# EAGLE board Mega_Shield-v13 (EAGLE 8.4.1)
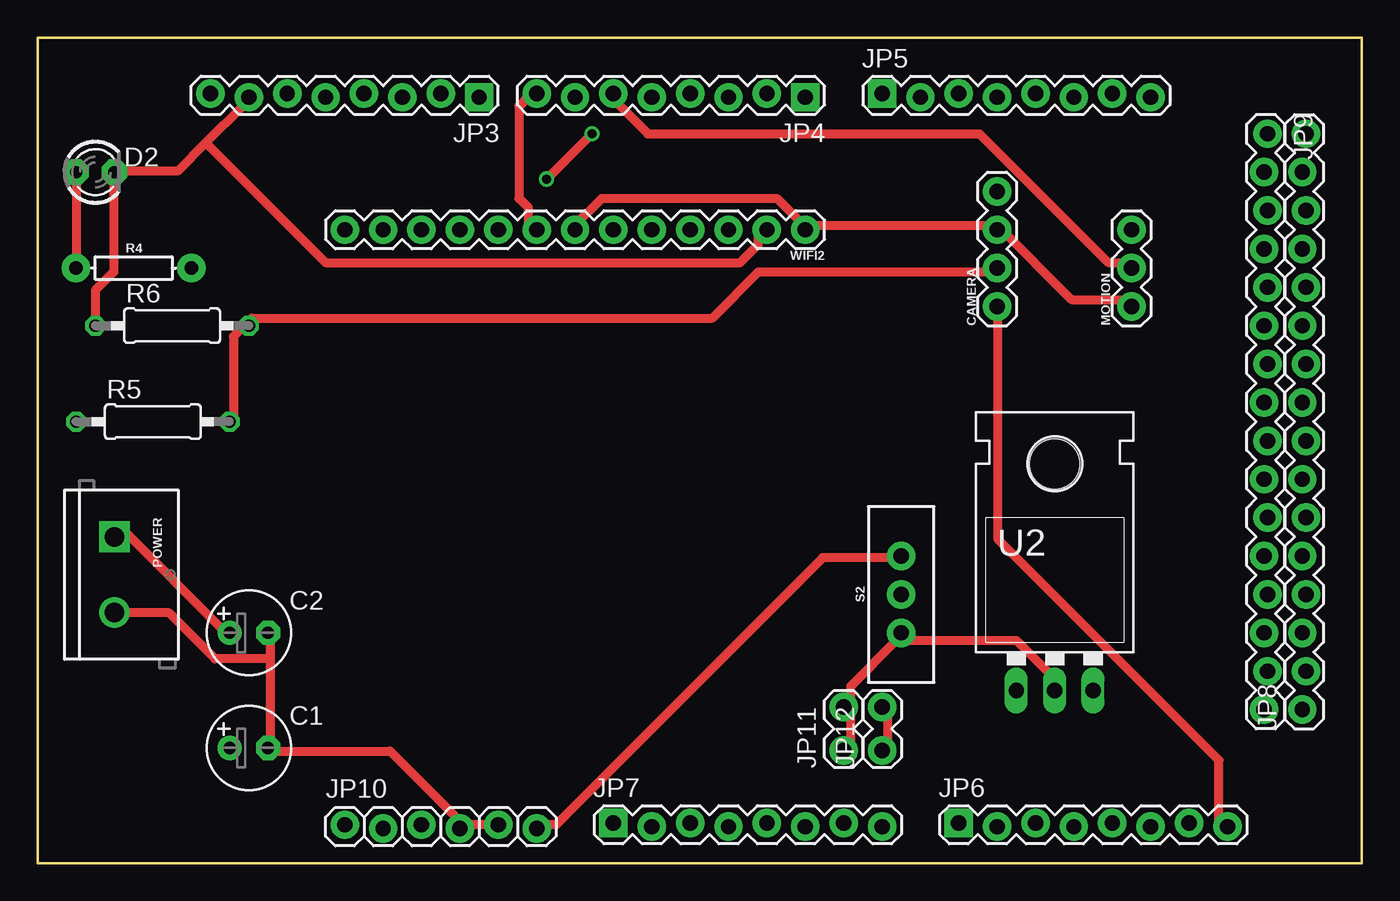
[diagram p0: board, top side]
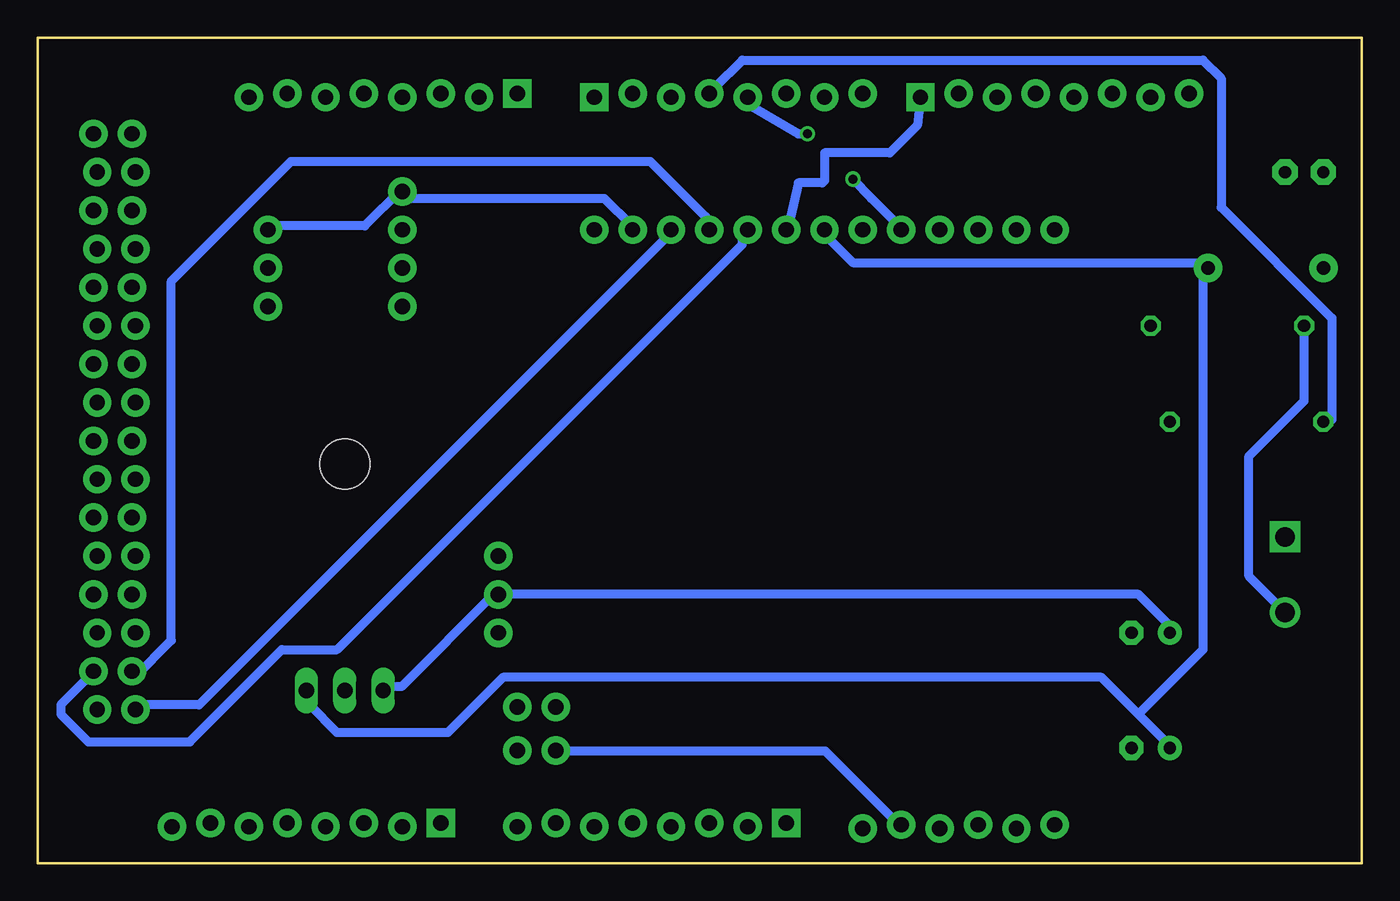
[diagram p1: board, bottom side, seen from below]

Size 87.63 x 54.61 mm. Coordinates in mm from the lower left corner, seen from the top.
Outline: 87.63,54.61 0,54.61 0,0 87.63,0 87.63,54.61
Copper layers (1*16): Top 0.035mm / dielectric 1.5mm / Bottom 0.035mm
Design rules "default *": minimum track width 24mil, minimum drill 0.35mm, track to track 24mil, track to pad 24mil, pad to pad 24mil, via to via 24mil, smd to smd 24mil, copper to edge 40mil, drill to drill 24mil, minimum pad ring 10mil, minimum via ring 8mil, stop-mask expansion 4mil, vias tented up to drill 0mil, thermal gap 10mil

## Footprints (pad centres in the part's own frame; a part is rotated, then mirrored left to right if it is on the bottom)
E2,5-6 = drill 0.813 pad 1.6: + -1.27,0 | drill 0.813 pad 1.6 octagon: - 1.27,0
1X04 = drill 1.016 pad 1.88: 1 0,0; 2 2.54,0; 3 5.08,0; 4 7.62,0
LED3MM = drill 0.813 pad 1.676 octagon: A -1.27,0; K 1.27,0
1X08_LOCK = drill 1.016 pad 1.88 square: 1 0,0.127 | drill 1.016 pad 1.88: 2 2.54,-0.127; 3 5.08,0.127; 4 7.62,-0.127; 5 10.16,0.127; 6 12.7,-0.127; 7 15.24,0.127; 8 17.78,-0.127
1X16_LOCK = drill 1.016 pad 1.88: 1 0,0.127; 2 2.54,-0.127; 3 5.08,0.127; 4 7.62,-0.127; 5 10.16,0.127; 6 12.7,-0.127; 7 15.24,0.127; 8 17.78,-0.127; 9 20.32,0.127; 10 22.86,-0.127; 11 25.4,0.127; 12 27.94,-0.127; 13 30.48,0.127; 14 33.02,-0.127; 15 35.56,0.127; 16 38.1,-0.127
1X06_LOCK = drill 1.016 pad 1.88: 1 0,0; 2 2.54,-0.254; 3 5.08,0; 4 7.62,-0.254; 5 10.16,0; 6 12.7,-0.254
1X02_LOCK = drill 1.016 pad 1.88: 1 -0.178,0; 2 2.718,0
1X03 = drill 1.016 pad 1.88: 1 0,0; 2 2.54,0; 3 5.08,0
SCREWTERMINAL-5MM-2 = drill 1.3 pad 2.032 square: 1 0,0 | drill 1.3 pad 2.032: 2 5,0
AXIAL-0.3 = drill 0.9 pad 1.88: P$1 -3.81,0; P$2 3.81,0
0207/10 = drill 0.813 octagon: 1 -5.08,0; 2 5.08,0
SWITCH_SPDT_PTH_11.6X4.0MM = drill 1.016 pad 1.88: 1 0,2.54; 2 0,0; 3 0,-2.54
TO-220-ALT = drill 1.016 long: GND 0,-3.81; IN -2.54,-3.81; OUT 2.54,-3.81 | hole 3.302: 0,11.176
1X13 = drill 1.016 pad 1.88: 1 0,0; 2 2.54,0; 3 5.08,0; 4 7.62,0; 5 10.16,0; 6 12.7,0; 7 15.24,0; 8 17.78,0; 9 20.32,0; 10 22.86,0; 11 25.4,0; 12 27.94,0; 13 30.48,0

## Placement (x,y rotation side)
C1  10uf  [E2,5-6]  13.97,7.62 0 top
C2  10uf  [E2,5-6]  13.97,15.24 0 top
CAMERA  [1X04]  63.5,36.83 90 top
D2  [LED3MM]  3.81,45.72 0 top
JP3  [1X08_LOCK]  29.21,50.8 180 top
JP4  [1X08_LOCK]  50.8,50.8 180 top
JP5  [1X08_LOCK]  55.88,50.8 0 top
JP6  [1X08_LOCK]  60.96,2.54 0 top
JP7  [1X08_LOCK]  38.1,2.54 0 top
JP8  M16LOCK  [1X16_LOCK]  83.82,10.16 90 top
JP9  M16LOCK  [1X16_LOCK]  81.28,48.26 270 top
JP10  [1X06_LOCK]  20.32,2.54 0 top
JP11  [1X02_LOCK]  53.34,7.62 90 top
JP12  [1X02_LOCK]  55.88,7.62 90 top
MOTION  [1X03]  72.39,36.83 90 top
POWER  [SCREWTERMINAL-5MM-2]  5.08,21.59 270 top
R4  1k  [AXIAL-0.3]  6.35,39.37 0 top
R5  10k  [0207/10]  7.62,29.21 0 top
R6  10k  [0207/10]  8.89,35.56 0 top
S2  [SWITCH_SPDT_PTH_11.6X4.0MM]  57.15,17.78 0 top
U2  [TO-220-ALT]  67.31,15.24 0 top
WIFI2  [1X13]  50.8,41.91 180 top

## Library data of the parts
C1 C2 R5 R6 = rcl
CAMERA = SparkFun-Connectors; PROD_ID: CONN-09696
D2 = minimidi
JP3-JP12 = SparkFun
MOTION WIFI2 = SparkFun-Connectors
POWER = SparkFun-Connectors; SF_SKU: PRT-08432
R4 = SparkFun-Resistors; PROD_ID: RES-08380
S2 = SparkFun-Switches; PROD_ID: SWCH-08261; SF_SKU: COM-00102
U2 = SparkFun-IC-Power; PROD_ID: VREG-08450; SF_ID: COM-00107

## Nets
3.3: JP10.2
5V: JP10.3
5V@1: JP12.1 JP12.2
9V: JP10.6 S2.1
A0: JP7.1
A1: JP7.2
A2: JP7.3
A3: JP7.4
A4: JP7.5
A5: JP7.6
A6: JP7.7
A7: JP7.8
A8: JP6.1
A9: JP6.2
A10: JP6.3
A11: JP6.4
A12: JP6.5
A13: JP6.6
A14: JP6.7
A15: CAMERA.1 JP6.8
AREF: JP3.8
D2: JP4.3
D3: JP4.4 R5.1
D4: JP4.5 WIFI2.9
D5: JP4.6 MOTION.2
D6: JP4.7
D7: JP4.8 WIFI2.8
D8: JP3.1 WIFI2.6
D9: JP3.2
D10: JP3.3
D11: JP3.4
D12: JP3.5
D13: JP3.6
D14: JP5.8
D15: JP5.7
D16: JP5.6
D17: JP5.5
D18: JP5.4
D19: JP5.3
D22: JP9.1
D23: JP8.16
D24: JP9.2
D25: JP8.15
D26: JP9.3
D27: JP8.14
D28: JP9.4
D29: JP8.13
D30: JP9.5
D31: JP8.12
D32: JP9.6
D33: JP8.11
D34: JP9.7
D35: JP8.10
D36: JP9.8
D37: JP8.9
D38: JP9.9
D39: JP8.8
D40: JP9.10
D41: JP8.7
D42: JP9.11
D43: JP8.6
D44: JP9.12
D45: JP8.5
D46: JP9.13
D47: JP8.4
D48: JP9.14
D49: JP8.3
D50: JP9.15 WIFI2.4
D51: JP8.2 WIFI2.5
D52: JP9.16 WIFI2.3
D53: JP8.1
GND: C1.- C2.- CAMERA.4 D2.K JP3.7 JP10.4 JP10.5 JP11.1 JP11.2 MOTION.3 POWER.2 R6.1 S2.3 U2.GND WIFI2.2
N$1: C2.+ POWER.1 S2.2 U2.IN
N$3: D2.A R4.P$1
N$4: CAMERA.2 R5.2 R6.2
RES: JP10.1
RX0: JP4.1
SCL: JP5.1
SDA: JP5.2
TX1: JP4.2
VIN: C1.+ CAMERA.3 MOTION.1 R4.P$2 U2.OUT WIFI2.1 WIFI2.7

## Tracks (layer width: path | path; a pad name or v marks a point on that pad's centre or on a via)
5V@1
  Top 0.61: JP12.1 56.24,8.03 56.24,9.86 JP12.2
9V
  Top 0.61: JP10.6 33.07,2.54 34.29,2.54 51.97,20.22 56.85,20.22 S2.1
A15
  Top 0.61: CAMERA.1 63.55,36.68 63.55,21.44 78.18,6.81 78.18,2.54 JP6.8
D3
  Top 0.152: 43.18,50.8 JP4.4
  Bottom 0.61: R5.1 1.98,29.36 1.98,36.07 9.3,43.38 9.3,51.92 10.52,53.14 41,53.14 42.82,51.31 JP4.4
D4  (via drill 0.6 pad 0.85)
  Top 0.61: v36.68,48.26 v33.68,45.26
  Bottom 0.61: v33.68,45.26 32.46,43.99 30.63,42.16 WIFI2.9 | v36.68,48.26 37.29,48.26 40.39,50.09 JP4.5
D5
  Top 0.61: MOTION.2 72.09,39.73 70.87,39.73 62.33,48.26 40.39,48.26 37.95,50.7 JP4.6
D7
  Top 0.61: WIFI2.8 32.46,42.16 32.46,43.38 31.85,43.99 31.85,50.09 32.46,50.7 JP4.8
D8
  Bottom 0.61: JP3.1 29.41,48.82 31.24,46.99 35.56,46.99 35.56,45.16 35.71,45.01 37.29,45.01 37.95,42.16 WIFI2.6
D50
  Bottom 0.61: WIFI2.4 43.43,42.16 43.43,42.77 47.09,46.43 70.87,46.43 78.79,38.51 78.79,14.73 81.23,12.29 JP9.15
D51
  Top 0.152: 83.82,12.7 JP8.2
  Bottom 0.61: WIFI2.5 41,41.55 41,40.95 67.82,14.12 71.48,14.12 77.57,8.03 84.28,8.03 86.11,9.86 86.11,10.46 84.28,12.29 JP8.2
D52
  Bottom 0.61: JP9.16 80.62,10.46 76.96,10.46 45.87,41.55 WIFI2.3
GND
  Top 0.61: R6.1 3.81,37.9 5.03,39.12 5.03,45.21 D2.K 5.64,45.82 9.3,45.82 11.12,47.65 | 11.12,47.65 13.56,50.09 JP3.7 | JP11.1 53.8,8.03 53.8,9.86 JP11.2 53.8,10.46 53.8,11.68 56.85,14.73 S2.3 57.46,14.73 64.77,14.73 67.21,12.29 67.21,11.68 U2.GND | JP10.5 28.19,2.54 JP10.4 27.58,2.54 27.58,3.15 23.32,7.42 15.39,7.42 C1.- 15.39,8.03 15.39,13.51 | 15.39,13.51 15.39,14.73 C2.- | 15.39,13.51 11.73,13.51 8.69,16.56 5.64,16.56 POWER.2 | 11.12,47.65 19.05,39.73 46.48,39.73 47.7,40.95 47.7,41.55 WIFI2.2
  Bottom 0.508: 30.23,2.29 JP10.5
  Bottom 0.61: WIFI2.2 48.31,42.16 50.14,43.99 62.94,43.99 CAMERA.4 63.55,44.6 65.99,42.16 72.09,42.16 MOTION.3 | JP11.1 53.19,7.42 35.51,7.42 30.63,2.54 JP10.5 | R6.1 3.81,30.58 7.47,26.92 7.47,19 5.64,17.17 POWER.2
N$1
  Top 0.61: C2.+ 12.34,15.34 5.64,22.05 POWER.1
  Bottom 0.61: U2.IN 64.77,11.68 63.55,11.68 57.46,17.78 S2.2 14.78,17.78 12.34,15.34 C2.+
N$3
  Top 0.61: D2.A 2.59,45.21 2.59,39.73 R4.P$1
N$4
  Top 0.61: R5.2 12.95,29.36 12.95,34.85 13.56,35.46 R6.2 14.17,36.07 44.65,36.07 47.7,39.12 62.94,39.12 CAMERA.2
VIN
  Top 0.61: MOTION.1 72.09,37.29 68.43,37.29 63.55,42.16 CAMERA.3 62.94,42.16 51.36,42.16 WIFI2.1 50.75,42.16 48.92,43.99 37.34,43.99 35.51,42.16 WIFI2.7
  Bottom 0.61: 14.78,9.86 12.95,8.03 C1.+ | 14.78,9.86 17.22,12.29 56.85,12.29 60.5,8.64 67.82,8.64 69.65,10.46 69.65,11.07 U2.OUT | WIFI2.7 35.51,41.55 33.68,39.73 10.52,39.73 R4.P$2 10.52,39.12 10.52,14.12 14.78,9.86